# Altium PCB BLCD-M8.PCBDOC
Units mil, origin at the board's own origin, x right, y up, seen from the top; angles counter-clockwise.
Board outline 1968.5 x 1153.54 mil, 2 copper layers (Top Layer, Bottom Layer); 134 components, 42 nets, 378 pads, 136 vias.
Unrouted connection lines stored in the file: 1.
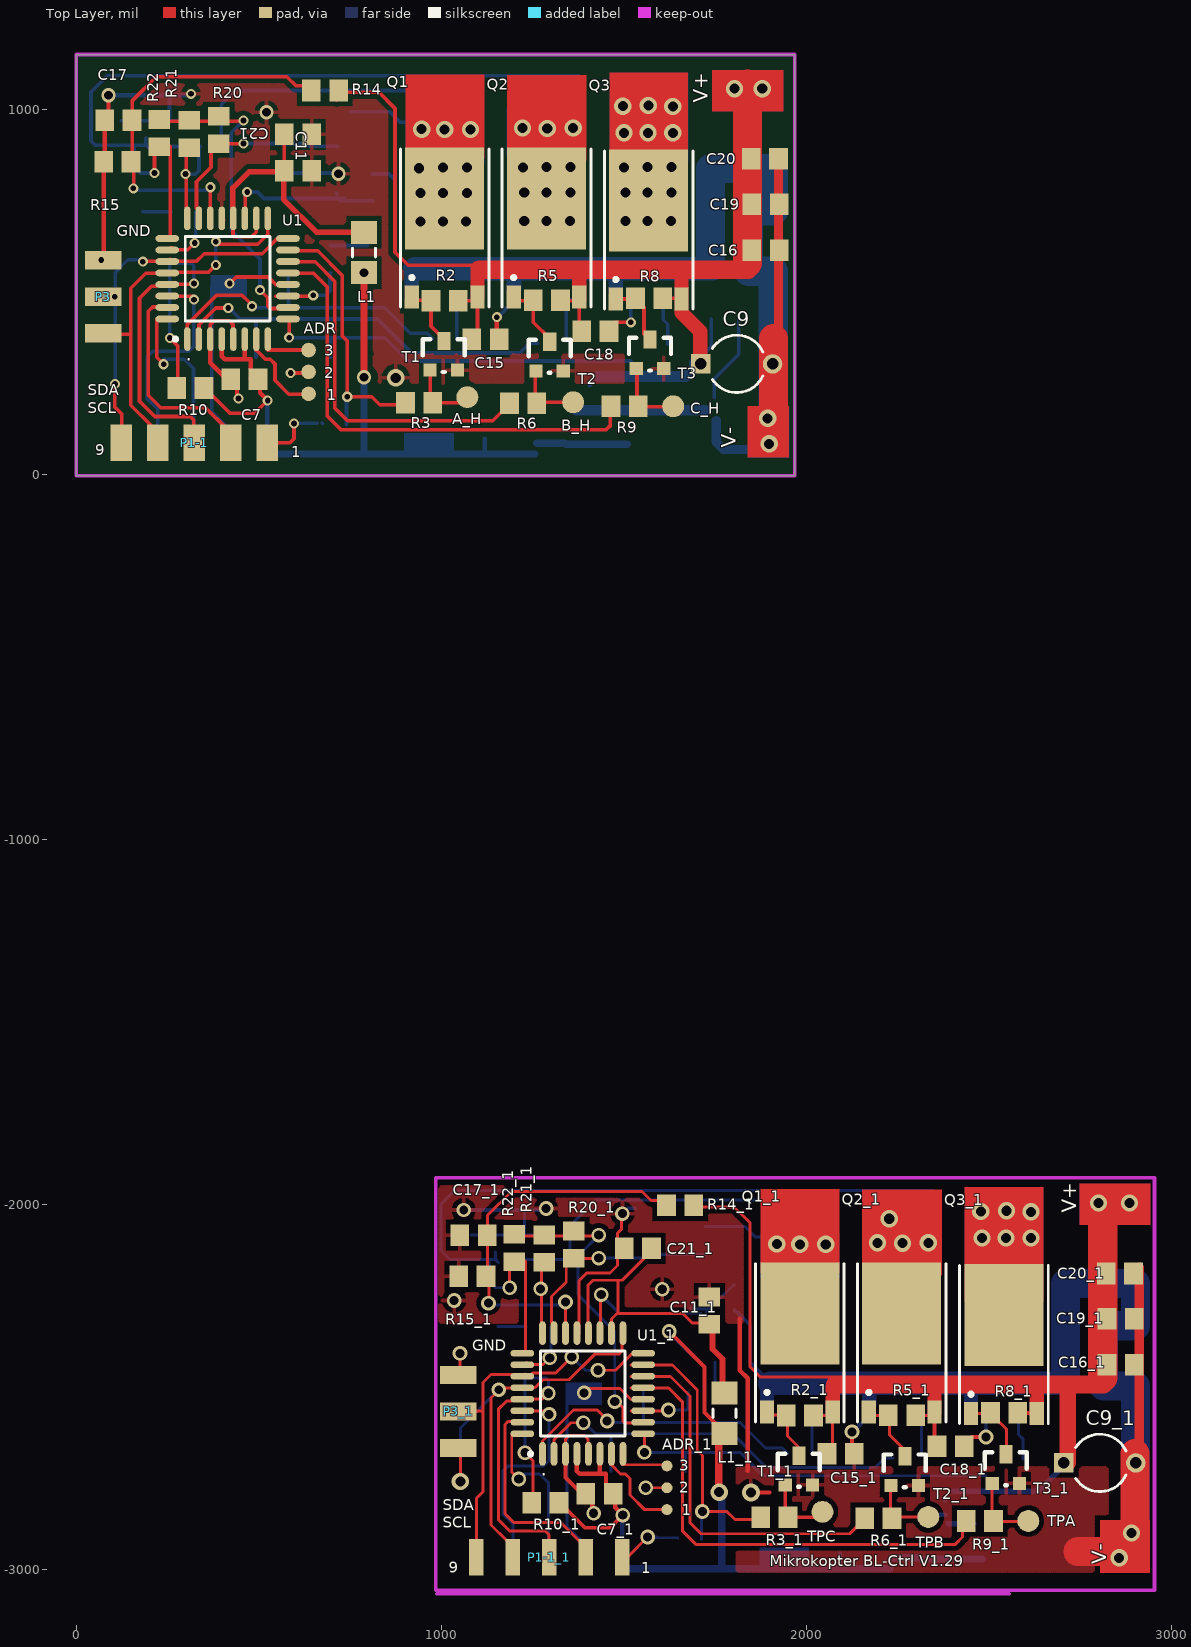
[diagram p0: Top Layer view]
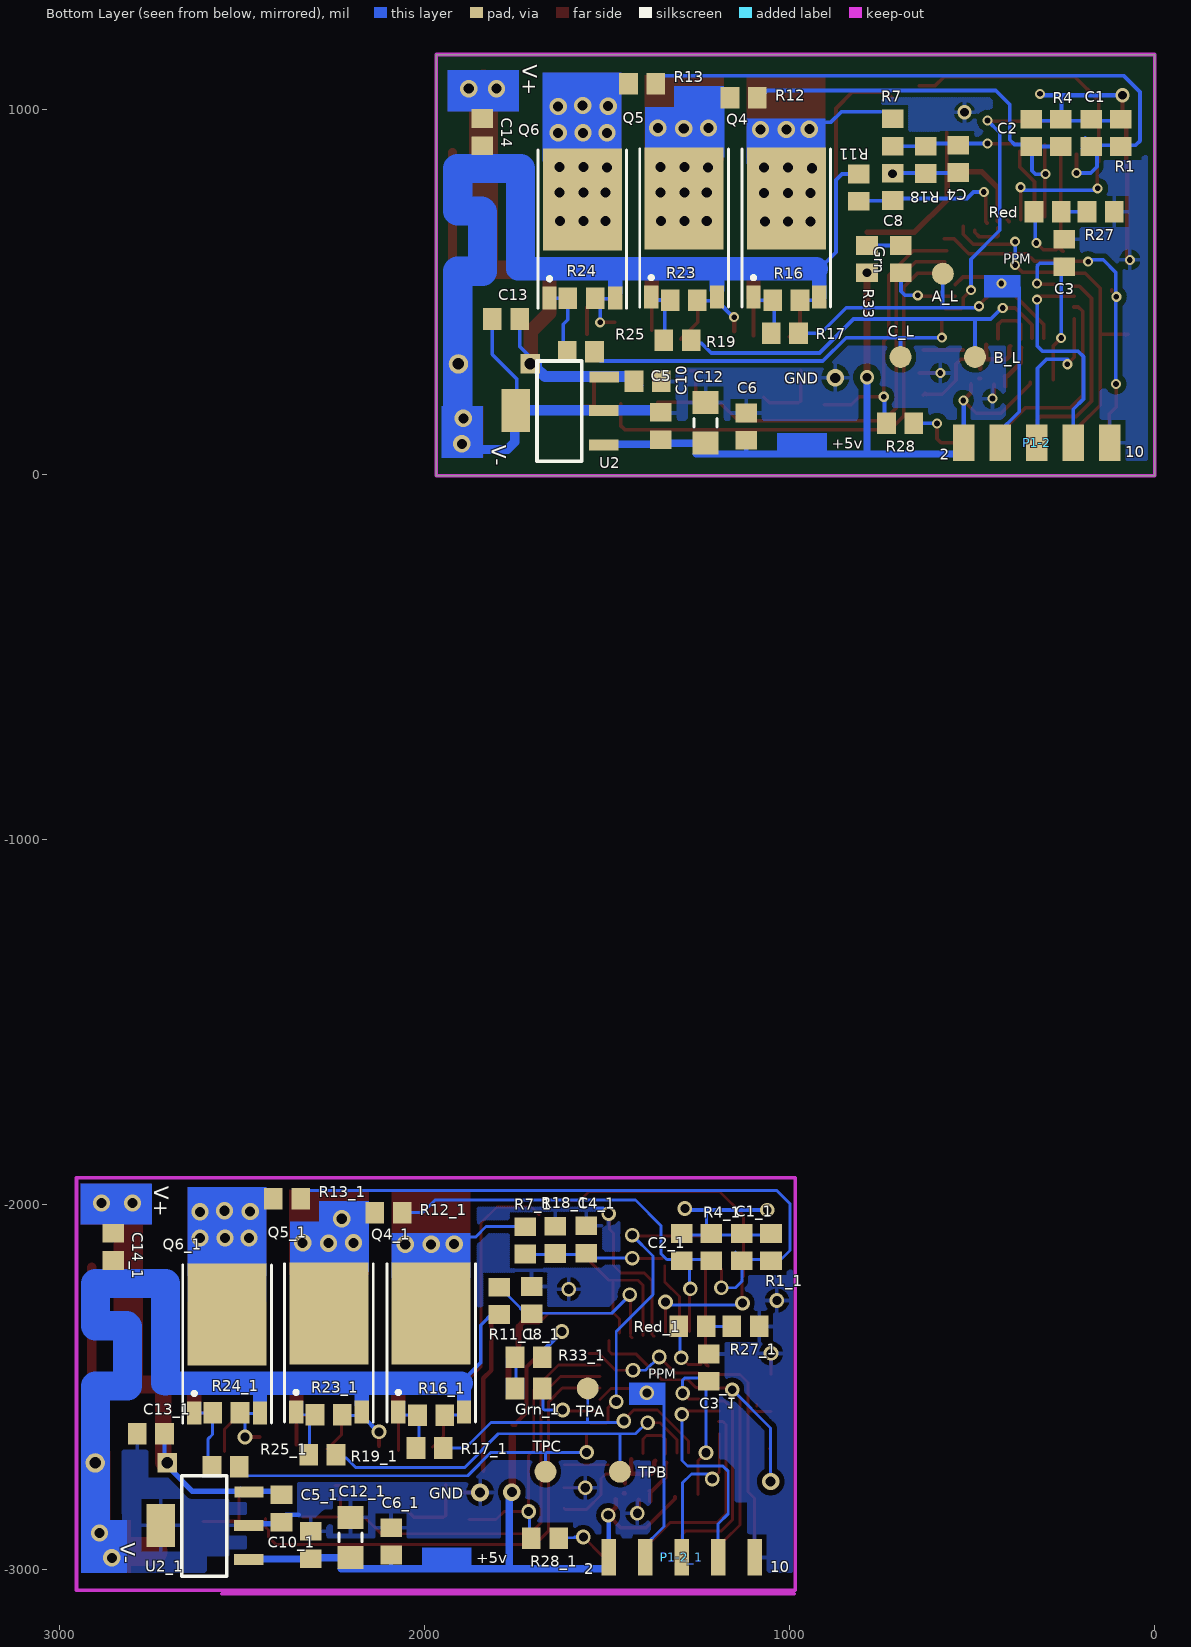
[diagram p1: Bottom Layer view, seen from below]

## Layer stack, top to bottom
Top Layer: signal copper 1.4
Dielectric: dielectric 12.6, FR-4, Dk 4.8
Bottom Layer: signal copper 1.4

## Board outline
0,-2 0,1151.54 1968.5,1151.54 1968.5,-2

## Design rules (kind name [scope] priority, off if disabled: settings)
Clearance Polygon [(InPolygon)] p1: gap=13
Clearance [All] p2: gap=10
ComponentClearance [All] p1: gap=10 collisioncheckmode=3 verticalgap=10
PolygonConnect [All] p1: connectstyle=Relief reliefconductorwidth=10 reliefentries=4 polygonreliefangle="90 Angle"
RoutingVias [All] p1: holewidth=25 width=40 viastyle="Through Hole" minholewidth=28 minwidth=50 maxholewidth=28 maxwidth=50
SolderMaskExpansion [All] p1: expansion=4
TestPointUsage [All] p1: valid=0 allowmultiple=FALSE
Testpoint [All] p1: side=15 testpointundercomponent=TRUE minsize=40 maxsize=100 preferedsize=60 minholesize=0 maxholesize=40 preferedholesize=32 testpointgrid=1 style=1023 order=0123456789
Width [All] p1: maxlimit=100 minlimit=10 preferedwidth=10
18 further rules are at their usual default settings.

## Classes and differential pairs
component class BLDC-M8_V1.24: ADR C1 C2 C3 C4 C5 C6 C7 C8 C9 C10 C11 C12 C13 C14 C15 C16 C17 C18 C19 C20 C21 Grn L1 P1-1 P1-2 P3 Q1 Q2 Q3 Q4 Q5 Q6 R1 R2 R3 R4 R5 R6 R7 R8 R9 R10 R11 R12 R13 R14 R15 R16 R17 R18 R19 R20 R21 R22 R23 R24 R25 R27 R28 R33 Red T1 T2 T3 U1 U2

## Components (designator, comment, footprint, x,y, rotation, side; value= is the part's Value field where it differs from the comment)
ADR "Address" "PCBComponent_1 - duplicate1"#1 636,282 r90 top (schematic designator P2)
ADR_1 "Address" "PCBComponent_1 - duplicate1"#2 1618,-2775 r90 top locked (schematic designator P2)
C1 "Cap" 6-0805 173,937 r270 bottom
C1_1 "Cap" 6-0805 1131,-2116 r270 bottom (schematic designator C1)
C2 "Cap" 6-0805 338,937 r270 bottom
C2_1 "Cap" 6-0805 1296,-2116 r270 bottom (schematic designator C2)
C3 "Cap" 6-0805 248,608 r90 bottom
C3_1 "Cap" 6-0805 1221,-2446 r90 bottom (schematic designator C3)
C4 "Cap" 6-0805 538,866 r90 bottom
C4_1 "Cap" 6-0805 1557,-2095 r270 bottom (schematic designator C4)
C5 "Cap" 6-0805 1353,134 r90 bottom
C5_1 "Cap" 6-0805 2311.98,-2931.98 r90 bottom (schematic designator C5)
C6 "Cap" 6-0805 1118.98,132.02 r90 bottom
C6_1 "Cap" 6-0805 2091.98,-2921.98 r90 bottom (schematic designator C6)
C7 "Cap" 6-0805 460,262 r180 top
C7_1 "Cap" 6-0805 1433,-2792 r180 top (schematic designator C7)
C8 "Cap" 6-0805 718,789 r90 bottom
C8_1 "Cap" 6-0805 1707,-2261 r90 bottom (schematic designator C8)
C9 "Comment" CAPR5-4X5 1809,304 r0 top
C9_1 "Comment" CAPR5-4X5 2804,-2707 r0 top
C10 "Cap" 6-0805 1389,256 r180 bottom
C10_1 "Cap" 6-0805 2391.98,-2831.98 r270 bottom (schematic designator C10)
C11 "Cap" 6-0805 607,833 r0 top
C11_1 "Cap" 6-0805 1733.99,-2290.02 r90 top (schematic designator C11)
C12 "Cap Pol1" 3216[1206] 1230,143 r90 bottom
C12_1 "Cap Pol1" 3216[1206] 2203,-2911 r90 bottom (schematic designator C12)
C13 "Cap" 6-0805 1777,427 r180 bottom
C13_1 "Cap" 6-0805 2750,-2627 r180 bottom (schematic designator C13)
C14 "Cap" 6-0805 1842,939 r90 bottom
C14_1 "Cap" 6-0805 2853,-2115 r90 bottom (schematic designator C14)
C15 "Cap" 6-0805 1121,372 r180 top
C15_1 "Cap" 6-0805 2094,-2682 r180 top (schematic designator C15)
C16 "Cap" 6-0805 1888,616 r0 top
C16_1 "Cap" 6-0805 2861,-2438 r0 top (schematic designator C16)
C17 "Cap" 6-0805 115,971 r180 top
C17_1 "Cap" 6-0805 1088,-2083 r180 top (schematic designator C17)
C18 "Cap" 6-0805 1422,393 r180 top
C18_1 "Cap" 6-0805 2395,-2661 r180 top (schematic designator C18)
C19 "Cap" 6-0805 1888,742 r0 top
C19_1 "Cap" 6-0805 2861,-2312 r0 top (schematic designator C19)
C20 "Cap" 6-0805 1886,866 r0 top
C20_1 "Cap" 6-0805 2859,-2188 r0 top (schematic designator C20)
C21 "Cap" 6-0805 607,933 r0 top
C21_1 "Cap" 6-0805 1538,-2119 r180 top (schematic designator C21)
Grn "LED0" 6-0805 696,591 r90 bottom
Grn_1 "LED0" 6-0805 1715,-2503 r0 bottom (schematic designator Grn)
L1 "Inductor" 3216[1206] 788,609 r90 top
L1_1 "Inductor" 3216[1206] 1776,-2571 r90 top (schematic designator L1)
P1-1 "MHDR1X5" "5 PIN"#1 323,88 r180 top
P1-1_1 "MHDR1X5" "5 PIN"#2 1296,-2966 r180 top (schematic designator P1-1)
P1-2 "MHDR1X5" "5 PIN"#1 323,88 r180 bottom
P1-2_1 "MHDR1X5" "5 PIN"#2 1296,-2966 r180 bottom (schematic designator P1-2)
P3 "TWI" "3 PIN" 73,488 r90 top
P3_1 "TWI" "3 PIN" 1046,-2566 r90 top (schematic designator P3)
Q1 "IRFR5305" TO-252AA 1009,622 r0 top
Q1_1 "IRFR5305" TO-252AA 1982,-2432 r0 top (schematic designator Q1)
Q2 "IRFR5305" TO-252AA 1288,622 r0 top
Q2_1 "IRFR5305" TO-252AA 2261,-2432 r0 top (schematic designator Q2)
Q3 "IRFR5305" TO-252AA 1568,617 r0 top
Q3_1 "IRFR5305" TO-252AA 2541,-2437 r0 top (schematic designator Q3)
Q4 "IRFR1205" TO-252AA 1009,622 r180 bottom
Q4_1 "IRFR1205" TO-252AA 1982,-2432 r180 bottom (schematic designator Q4)
Q5 "IRFR1205" TO-252AA 1289,622 r180 bottom
Q5_1 "IRFR1205" TO-252AA 2262,-2432 r180 bottom (schematic designator Q5)
Q6 "IRFR1205" TO-252AA 1568,619 r180 bottom
Q6_1 "IRFR1205" TO-252AA 2541,-2435 r180 bottom (schematic designator Q6)
R1 "Res2" 6-0805 93,937 r270 bottom
R1_1 "Res2" 6-0805 1051,-2116 r270 bottom (schematic designator R1)
R2 "Res2" 6-0805 1008.98,477.02 r0 top
R2_1 "Res2" 6-0805 1981.98,-2576.98 r0 top (schematic designator R2)
R3 "Res2" 6-0805 939,198 r0 top
R3_1 "Res2" 6-0805 1912,-2856 r0 top (schematic designator R3)
R4 "Res2" 6-0805 257,937 r270 bottom
R4_1 "Res2" 6-0805 1215,-2116 r270 bottom (schematic designator R4)
R5 "Res2" 6-0805 1289,478 r0 top
R5_1 "Res2" 6-0805 2262,-2576 r0 top (schematic designator R5)
R6 "Res2" 6-0805 1223.98,195.99 r0 top
R6_1 "Res2" 6-0805 2196.98,-2858.01 r0 top (schematic designator R6)
R7 "Res2" 6-0805 718,938 r270 bottom
R7_1 "Res2" 6-0805 1724,-2097 r270 bottom (schematic designator R7)
R8 "Res2" 6-0805 1569,484 r0 top
R8_1 "Res2" 6-0805 2542,-2570 r0 top (schematic designator R8)
R9 "Res2" 6-0805 1502.02,188 r0 top
R9_1 "Res2" 6-0805 2475.02,-2866 r0 top (schematic designator R9)
R10 "Res2" 6-0805 312,238 r0 top
R10_1 "Res2" 6-0805 1285,-2816 r0 top (schematic designator R10)
R11 "Res2" 6-0805 811,787 r90 bottom
R11_1 "Res2" 6-0805 1796,-2263 r270 bottom (schematic designator R11)
R12 "Res2" 6-0805 1126,1033 r180 bottom
R12_1 "Res2" 6-0805 2099,-2021 r180 bottom (schematic designator R12)
R13 "Res2" 6-0805 1404,1071 r180 bottom
R13_1 "Res2" 6-0805 2377,-1983 r180 bottom (schematic designator R13)
R14 "Res2" 6-0805 681,1053 r0 top
R14_1 "Res2" 6-0805 1654,-2001 r0 top (schematic designator R14)
R15 "Res2" 6-0805 112,858 r0 top
R15_1 "Res2" 6-0805 1085,-2196 r0 top (schematic designator R15)
R16 "Res2" 6-0805 1008.98,478 r180 bottom
R16_1 "Res2" 6-0805 1981.98,-2576 r180 bottom (schematic designator R16)
R17 "Res2" 6-0805 1013,388 r0 bottom
R17_1 "Res2" 6-0805 1986,-2666 r0 bottom (schematic designator R17)
R18 "Res2" 6-0805 627,863 r90 bottom
R18_1 "Res2" 6-0805 1642,-2096 r270 bottom (schematic designator R18)
R19 "Res2" 6-0805 1307.02,368.98 r0 bottom
R19_1 "Res2" 6-0805 2280.02,-2685.02 r0 bottom (schematic designator R19)
R20 "Res2" 6-0805 390,945 r90 top
R20_1 "Res2" 6-0805 1363,-2109 r90 top (schematic designator R20)
R21 "Res2" 6-0805 309,934 r90 top
R21_1 "Res2" 6-0805 1282,-2120 r90 top (schematic designator R21)
R22 "Res2" 6-0805 227,936 r90 top
R22_1 "Res2" 6-0805 1200,-2118 r90 top (schematic designator R22)
R23 "Res2" 6-0805 1290,479 r180 bottom
R23_1 "Res2" 6-0805 2263,-2575 r180 bottom (schematic designator R23)
R24 "Res2" 6-0805 1570,484 r180 bottom
R24_1 "Res2" 6-0805 2543,-2570 r180 bottom (schematic designator R24)
R25 "Res2" 6-0805 1572,337 r0 bottom
R25_1 "Res2" 6-0805 2545,-2717 r0 bottom (schematic designator R25)
R27 "Res2" 6-0805 148,720.99 r0 bottom
R27_1 "Res2" 6-0805 1121,-2333.01 r0 bottom (schematic designator R27)
R28 "Res2" 6-0805 697,141 r180 bottom
R28_1 "Res2" 6-0805 1670,-2913 r180 bottom (schematic designator R28)
R33 "Res2" 6-0805 788,591 r90 bottom
R33_1 "Res2" 6-0805 1715,-2417 r0 bottom (schematic designator R33)
Red "LED0" 6-0805 293,720.99 r180 bottom
Red_1 "LED0" 6-0805 1266,-2333.01 r180 bottom (schematic designator Red)
T1 "1P" SOT-23 969,287 r0 top
T1_1 "1P" SOT-23 1942,-2767 r0 top (schematic designator T1)
T2 "1P" SOT-23 1259,285 r0 top
T2_1 "1P" SOT-23 2232,-2769 r0 top (schematic designator T2)
T3 "1p" SOT-23 1534,291 r0 top
T3_1 "1p" SOT-23 2509,-2763 r0 top (schematic designator T3)
U1 "ATMEGA8_TQFP32" MEGA8 304,372 r90 top
U1_1 "ATMEGA8_TQFP32" MEGA8 1277,-2682 r90 top (schematic designator U1)
U2 "78L05" AMS1117 1509,82 r90 bottom
U2_1 "78L05" AMS1117 2482,-2972 r90 bottom (schematic designator U2)

## Footprints (in the part's own frame and the unit in brackets; to place one, negate y for a bottom-side part, rotate by r counter-clockwise, add the part's x,y. Pads: shape width x height; smd on the part's side, far side on the other; paste and mask are expansions set on the pad)
"3 PIN" [mil]
  rect 50x100 smd: 1(-100,0) 2(0,0) 3(100,0)
"5 PIN"#1 [mil]
  rect 60x100 smd: 1(-200,0) 2(-100,0) 3(0,0) 4(100,0) 5(200,0)
"5 PIN"#2 [mil]
  rect 40x100 smd: 1(-200,0) 2(-100,0) 3(0,0) 4(100,0) 5(200,0)
6-0805 [mm] "Chip Resistor; Body 2.0 x 1.3 mm (LxW typ)"
  rect 1.3x1.5 smd: 1(-0.95,0) 2(0.95,0)
3216[1206] [mm] "Chip Resistor; Body 3.2 x 1.6 mm (LxW typ)"
  rect 1.6x1.8 smd: 1(-1.4,0) 2(1.4,0)
  silkscreen extent -0.3,-0.8 0.3,0.8
AMS1117 [mil]
  rect 118.11x78.74 smd: 0(94,241)
  rect 30x80 smd: 1(0,0) 2(94,0) 3(186,-1)
  silkscreen extent -45,60 230,183
CAPR5-4X5 [mm] "Capacitor; 2 Leads"
  rect 1.35x1.35 hole 0.8: 1(-2.5,0)
  round 1.35 hole 0.8: 2(2.5,0)
  silkscreen extent -1.69,-2 1.82,2
MEGA8 [mm]
  oval 1.65x0.457 smd: 1(0,0) 2(0,-0.8) 3(0,-1.6) 4(0,-2.4) 5(0,-3.2) 6(0,-4) 7(0,-4.8) 8(0,-5.6) 17(8.4,-5.6) 18(8.4,-4.8) 19(8.4,-4) 20(8.4,-3.2) 21(8.4,-2.4) 22(8.4,-1.6) 23(8.4,-0.8) 24(8.4,0)
  oval 0.457x1.65 smd: 9(1.4,-7) 10(2.2,-7) 11(3,-7) 12(3.8,-7) 13(4.6,-7) 14(5.4,-7) 15(6.2,-7) 16(7,-7) 25(7,1.4) 26(6.2,1.4) 27(5.4,1.4) 28(4.6,1.4) 29(3.8,1.4) 30(3,1.4) 31(2.2,1.4) 32(1.4,1.4)
  silkscreen extent -0.12,-5.75 7.15,0.95
"PCBComponent_1 - duplicate1"#1 [mil]
  round 40 smd: 1(-60,0) 2(0,0) 3(60,0)
"PCBComponent_1 - duplicate1"#2 [mil]
  round 30 smd: 1(-60,0) 2(0,0) 3(60,0)
SOT-23 [mil]
  rect 36x36 smd: 1(75,0) 2(0,0)
  rect 36x50 smd: 3(38,80)
  silkscreen extent -20,-5 95,85
TO-252AA [mm] "D-PAK/TO-252-AA; 3 Leads (1 Cropped); Body 10.4 (inc. leads) x 6.7 mm (LxW max)"
  rect 1x1.6 smd: 1(-2.285,-3.425) 3(2.285,-3.425)
  rect 5.5x7.1 smd: 4(0,3.425)
  silkscreen extent -3.09,-4.13 3.09,6.88

## Part data
ADR ADR_1 P3 P3_1: library part "Header 3", "Header, 3-Pin"
C1 C1_1 C2 C2_1 C3 C3_1 C4 C4_1 C5 C5_1 C6 C6_1 C7 C7_1 C8 C8_1 C10 C10_1 C11 C11_1 C13 C13_1 C14 C14_1 C15 C15_1 C16 C16_1 C17 C17_1 C18 C18_1 C19 C19_1 C20 C20_1 C21 C21_1: "Capacitor"
C12 C12_1: "Polarized Capacitor (Radial)"
Grn Grn_1 Red Red_1: "Typical INFRARED GaAs LED"
P1-1 P1-1_1 P1-2 P1-2_1: "Header, 5-Pin"
Q1 Q1_1 Q2 Q2_1 Q3 Q3_1 Q4 Q4_1 Q5 Q5_1 Q6 Q6_1: "HEXFET Power MOSFET"
R1 R1_1 R2 R2_1 R3 R3_1 R4 R4_1 R5 R5_1 R6 R6_1 R7 R7_1 R8 R8_1 R9 R9_1 R10 R10_1 R11 R11_1 R12 R12_1 R13 R13_1 R14 R14_1 R15 R15_1 R16 R16_1 R17 R17_1 R18 R18_1 R19 R19_1 R20 R20_1 R21 R21_1 R22 R22_1 R23 R23_1 R24 R24_1 R25 R25_1 R27 R27_1 R28 R28_1 R33 R33_1: "Resistor"
T1 T1_1: library part 2N3904, "NPN General Purpose Amplifier"
T2 T2_1 T3 T3_1: library part QNPN, "NPN Bipolar Transistor"
U1 U1_1: "Atmel Microcontroller - Library created by carel..  <www.mpfreezone.com>"
U2 U2_1: "3-Terminal Positive Voltage Regulator"

## Free pads (board coordinates)
  round 60 smd: 0(1635,188) 0(2608,-2866) 1(1361,199) 1(2334,-2855) 2(1071,213) 2(2044,-2841)
  round 60 smd far side: 3(580.08,551.21) 3(1553.08,-2502.79) 4(492,323) 4(1465,-2731) 5(696,323) 5(1669,-2731)

## Via types
v1: diameter 47.24, hole 27.56, Top Layer to Bottom Layer, tented both sides, 63 vias
v2: diameter 40, hole 25, Top Layer to Bottom Layer, tented both sides, 31 vias
v3: diameter 27.56, hole 15.75, Top Layer to Bottom Layer, tented both sides, 31 vias
v4: diameter 39.37, hole 23.62, Top Layer to Bottom Layer, tented both sides, 7 vias
v5: diameter 40, hole 25, Top Layer to Bottom Layer, 2 vias
v6: diameter 50, hole 28, Top Layer to Bottom Layer, 1 vias
v7: diameter 27.56, hole 15.75, Top Layer to Bottom Layer, 1 vias

## Nets (pads, with @x,y where several pads share a name; then routed paths per layer and width w, separated by ;. In a path a pad name is that pad's centre, name@x,y a point inside that pad or via, vN(x,y) a via of type N, cw(c..) or ccw(c..) an arc to the next point about the centre after c; other vN are vias at no path point)
+5V: C5.1 C6.1 C7.1 C12.1 L1.1 P1-2.1 R10.2 R33.1 U1.4 U1.6 U2.1 | length 2072.6
  Top Layer w10: R10.2@341,254 341,249 421,169 489,169 v3@520,200
  Top Layer w12: U1.4@395,353 398,350 398,325 405,318 ; 406,317 478,317 C7.1@478,291 ; 461,322 U1.6@461,357 ; C7.1@478,264 C7.1@481,264 ; C7.1@503,248.28 503,225 v3(524,204)
  Top Layer w20: v4(788,267) v4(788,553.6)
  Bottom Layer w10: P1-2.1 P1-2.1@523,100 ; 1323.32,88.54 C5.1@1339,88.54
  Bottom Layer w12: P1-2.1@514,107 523,116 v3@523,196 ; 1119,56 C6.1@1119,98.54
  Bottom Layer w20: P1-2.1@541,57 C12.1@1256,57 ; 788,63 v4(788,267) ; C12.1@1261,87 C5.1@1338,87 ; C5.1@1340,84 U2.1@1509,84
A1: ADR.1 U1.7 | length 229.6
  Top Layer w10: U1.7@491,342 U1.7@491,349 ; U1.7@494,341 518,317 531,317 544,304 544,259 582,221 632,221 ADR.1@634,219 ; ADR.1@625,220 ADR.1@629,224
A3: ADR.3 U1.8 | length 109
  Top Layer w10: U1.8@524,342 ADR.3@633,342
A_H: R3.1 R28.1 U1.15 | length 785.2
  Top Layer w10: U1.15@570,614 661,614 728,547 728,381 742,367 v3(742,214) 809,214 831,192 R3.1@905.54,192
  Bottom Layer w10: v3@739,224 740,224 R28.1@740,137
A_L: pad.3@580.08,551.21 R17.1 U1.1 | length 870.3
  Top Layer w10: U1.1@304,375 304,412 384,492 454,492 472,474
  Bottom Layer w10: v3@479,461 482,458 845,458 915,388 961,388 R17.1@976,373 ; pad.3@580.08,551.21 581,460
  other v3: 481,462
AVERAGE: R20.2 R21.2 R22.2 U1.10 | length 831
  Top Layer w10: R22.2@234,968.46 442,968.46 ; v3@502,514 v3@509,514 ; v3(503,506) 524,485 524,462 530,456 U1.10@573,456
  Bottom Layer w10: v3(458,971) 424,937 424,670 503,591 v3(503,506)
B_H: R6.1 U1.14 | length 1016.2
  Top Layer w10: U1.14@575,583.63 654.37,583.63 708,530 708,183 743,148 1141,148 R6.1@1188,195
B_L: pad.4@492,323 R19.1 U1.2 | length 1146.6
  Top Layer w10: U1.2@336,374 336,411 382,457 v3(416,457)
  Bottom Layer w10: v3@418,458 449,427 825,427 918,334 1215,334 1242,361 R19.1@1264,361 ; pad.4@492,323 492,425
C_H: R9.1 U1.13 | length 1338.1
  Top Layer w10: U1.13@574,552.13 649.63,552.13 687,514.76 687,161 724,124 1452,124 1463,135 R9.1@1463,195
C_L: pad.5@696,323 R25.1 U1.9 | length 1061.5
  Top Layer w10: v3(583,376) U1.9@583,425
  Bottom Layer w10: v3(583,376) 845,376 909,312 R25.1@1518,312 ; pad.5@696,323 696,374
CURRENT: C8.1 R11.1 U1.19 | length 454.4
  Top Layer w10: U1.19@459,690 U1.19@463,694 ; U1.19@463,699.77 463,769 v3@469,775
  Bottom Layer w10: v3(468,775) 496,775 514,757 C8.1@737,757 ; C8.1@711,772 C8.1@714,769 ; C8.1@723,751 R11.1@813.3,751
GND: ADR.2 C1.1 C2.1 C3.2 C4.1 C5.2 C6.2 C7.2 C8.2 C9.2 C10.2 C11.2 C12.2 C13.1 C14.1 C15.1 C16.2 C17.2 C18.1 C19.2 C20.2 C21.2 P1-2.5 P3.3 Q4.3 Q5.3 Q6.3 R1.1 R4.1 R11.2 R15.1 R16.2 R18.1 R23.2 R24.2 R27.1 T1.1 T2.1 T3.1 U1.3 U1.5 U1.21 U2.0 U2.2 | length 7149.3
  Top Layer w10: U1.3 367,412 377,422 419,422 428.98,412.02 U1.5@428.98,373 ; U1.21@399,694 U1.21@404,699 ; v3(587,279) v3@587.96,279.19 ; v3@588,279 ADR.2@645,279 ; C18.1@1479,418 v3(1519,418)
  Top Layer w12: P3.3@74.6,582.6 R15.1 ; R15.1@77.6,861 C17.2 ; C17.2@88,969 v4(88,1040) ; U1.3@365,348 367,346 367,307 404,270 C7.2@411,270 ; C7.2@409,242 C7.2@409,263 ; v3@440,207 C7.2@440,247 ; C15.1@1152,394 v3(1152,432)
  Top Layer w25: 1924,395 C20.2@1924,883
  Top Layer w80: 1909.46,191 1909.46,374
  Bottom Layer w10: 123,970.46 C2.1@323,970.46 ; R4.1@255,975 255,1040 ; R11.2 856.6,824.4 873,808 873,610 906,577 918,577 918,576 ; Q4.3@929,478 R16.2@975.54,478 ; 932,547 932,556 ; 998.5,564.96 1769,564.96 ; 1199,534.92 1236.08,572 1737,572 ; Q5.3@1211,477 R23.2@1252,477 ; Q6.3@1480,483 R24.2@1526.54,483 ; v3@1519,423 R24.2@1519,467 ; U2.0@1748,211 1748,263 1815,330 C13.1@1815,430
  Bottom Layer w12: v4(88,1040) v3@312,1040 ; C4.1@541,827 C8.2@721,827 ; v3@1152,430 Q5.3@1196,474
  Bottom Layer w25: U2.0@1753,149 1753,90 1773,70 1859,70
  Bottom Layer w30: C5.2@1369,177 U2.0@1723,177
  Bottom Layer w39: Q4.3@919,486 919,573 ; Q6.3@1478,498.72 1478,555.99
  Bottom Layer w40: Q5.3@1199,508 1199,534.92
  Bottom Layer w65: 927,564.96 1744,564.96
  Bottom Layer w80: 1737,572 1737,839 1909.45,839 1909.45,723 1844,723 1841,720 1841,558 1909.45,558 1909.45,177
  other v1: 1898,85 1894,155 875,266
  other v3: 444,209 68,589 314,1044
  other v4: 718,825 521,993
GREEN: Grn.1 U1.11 | length 199.9
  Top Layer w10: 546.62,489.14 U1.11@597,489.14 ; U1.11@599,489 v3@647,489
  Bottom Layer w10: v3(649,492) 684,492 695,503 695,552.6 Grn.1
INT0: P1-2.3 U1.32 | length 430.3
  Top Layer w10: U1.32@219.85,427 219.85,322.15 v3(239,303)
  Bottom Layer w10: 238,317 296,317 321,292 P1-2.3@321,87
NetC11_1: C11.1 C21.1 L1.2 U1.18 U1.20 | length 779.3
  Top Layer w10: U1.20@429,677 429,656 433,652 480,652 493,665 493,670 ; C11.1@569,837 C21.1@569,938
  Top Layer w15: U1.20@429,696 429,786 474,831 568,831 568,755 658.88,664.12 L1.2
NetD1_2: Grn.2 R33.2 | length 102
  Bottom Layer w10: Grn.2 R33.2@798,628.4
NetD2_2: R27.2 Red.2 | length 78.1
  Bottom Layer w10: R27.2@181.46,721 Red.2@259.54,721
NetP1-1_1: P1-1.1 R28.2 | length 199
  Top Layer w10: P1-1.1 585,88 596,99 v3(596,141) ; P1-1.1@524,91 P1-1.1@539,91
  Bottom Layer w10: v3(596,141) R28.2@659,141 ; R28.2@673.54,142 R28.2@674.54,141
NetQ1_1: Q1.1 R2.1 T1.3 | length 162.7
  Top Layer w10: Q1.1@924,478 R2.1@975.54,478 ; R2.1 971.58,407.42 T1.3@1001,378
NetQ2_1: Q2.1 R5.1 T2.3 | length 173.2
  Top Layer w10: Q2.1@1200,477 R5.1@1248,477 ; R5.1 1251.6,418.4 T2.3@1298,372
NetQ3_1: Q3.1 R8.1 T3.3 | length 116
  Top Layer w10: Q3.1@1480,482 R8.1@1522,482 ; T3.3@1555,385 R8.1@1555,459
NetQ4_1: Q4.1 R16.1 R17.2 | length 179.2
  Bottom Layer w10: R17.2@1042.46,370 1042.46,478 Q4.1@1098.96,478 ; Q4.1@1098.96,472.5 Q4.1
NetQ5_1: Q5.1 R19.2 R23.1 | length 159.6
  Bottom Layer w10: R23.1 Q5.1@1377,479 ; R19.2@1342.46,367 R23.1@1342.46,477
NetQ6_1: Q6.1 R24.1 R25.2 | length 176.4
  Bottom Layer w10: R24.1 Q6.1@1657.8,484 ; R24.1@1608,479 1608,425 1620,413 R25.2@1620,358
NetR3_2: pad.2@1071,213 R3.2 T1.2 | length 185.8
  Top Layer w10: R3.2@969,202 T1.2 ; R3.2 1056,198 pad.2@1071,213
NetR6_2: pad.1@1361,199 R6.2 T2.2 | length 202.5
  Top Layer w10: R6.2@1257.46,196 T2.2@1257.46,285.46 ; T2.2 T2.2@1272,285 ; R6.2@1261,199 pad.1@1361,199
NetR9_2: pad.0@1635,188 R9.2 T3.2 | length 218
  Top Layer w10: R9.2@1536,180 T3.2@1536,275 ; R9.2@1536,187 pad.0@1634,187 ; R9.2@1536,188 R9.2@1561.01,188
NULL_A: C4.2 R7.2 R18.2 R20.1 U1.23 | length 507
  Top Layer w10: U1.23@329,731 329,803 369,843 R20.1@369,887 ; R20.1@376,907 v3@459,907
  Bottom Layer w10: v3(458,908) R18.2@621,908 ; R18.2 R7.2@715.4,900.4
NULL_B: C2.2 R4.2 R12.2 R21.1 U1.24 | length 1237.8
  Top Layer w10: U1.24@301,707 R21.1@301,904
  Bottom Layer w10: R4.2 C2.2@338.6,899.6 ; v3(299,824) 327,824 336,833 C2.2@336,899.6 ; C2.2@364,905 384,905 397,918 397,1015 435,1053 1061,1053 R12.2@1087,1027
NULL_C: C1.2 R1.2 R13.2 R22.1 U1.25 | length 2104.7
  Top Layer w10: v3(214,827) R22.1@214,878 ; U1.25@257,644 257,900
  Bottom Layer w10: C1.2@158,900.6 158,844 175,827 v3(214,827) ; C1.2@190,903.54 C1.2@190,924 ; C1.2@198,895 193,900 193,903.54 51.46,903.54 40,915 40,1049 84,1093 R13.2@1377,1093
PHASE_A: Q1.4 Q4.4 R7.1 | length 426.7
  Top Layer w10: Q1.4 Q1.4@1009,773
  Bottom Layer w10: 751,994.4 858.6,994.4 886.54,966.46 915,966.46 ; v1@936,937 999,937 v1@1009,927 ; v1@936,950.46 1070.54,950.46 v1@1084,937 ; v1@1006,937 v1@1009,934
  other v1: 943,694 1004,694 1068,694 943,772 1004,772 1070,772 939,840 1004,842 1070,842 1009,946 1080,946 946,947
PHASE_B: Q2.4 Q5.4 R12.1 | length 373
  Top Layer w10: Q2.4@1309,756.84 1309,887 1342,920
  Bottom Layer w10: Q5.4@1243,782.46 Q5.4@1309,782.46 ; Q5.4@1309,756.84 Q5.4@1309,782.46 ; Q5.4@1309,887 Q5.4@1309,782.46
  other v1: 1227,696 1288,696 1352,696 1227,774 1288,774 1354,774 1223,842 1288,844 1354,844 1290,949 1222,950 1361,950
PHASE_C: Q3.4 Q6.4 R13.1 | length 211.5
  Top Layer w10: Q3.4@1609,719 Q3.4@1609,756.84
  Bottom Layer w10: 1553,1072 1568,1087 ; Q6.4@1608,719 1608,756.84 Q6.4@1608,871.46
  other v1: 1504,696 1565,696 1629,696 1504,774 1565,774 1631,774 1500,842 1565,844 1631,844 1500,937 1566,937 1634,937 1634,1009 1497,1010 1567,1012
PPM: P1-2.2 U1.12 | length 599.3
  Top Layer w10: v3(420,524) 438,542 525.26,542 546.62,520.64
  Bottom Layer w10: 372,515 371,514 371,173 432,112 432,97 P1-2.2
RED: Red.1 U1.26 | length 165.6
  Top Layer w10: U1.26@250,613 U1.26@258.8,621.8 ; U1.26@254,614 U1.26@261.8,621.8 ; U1.26@270,617 305,617 v3(324,635)
  Bottom Layer w10: v3@327,638 Red.1@327,719
RESET: C3.1 P1-1.3 R10.1 U1.29 | length 1043.4
  Top Layer w10: U1.29@220,517 206,517 173,484 173,202 215,160 313,160 ; v3(256,375) 278,353 R10.1@278,261 ; U1.29@275,522 v3@322,522 ; 312,160 322,150 P1-1.3@322,112
  Bottom Layer w10: C3.1@248,579.54 314.46,579.54 322,572 v3@322,526 ; v3(256,375) C3.1@256,573
  other v3: 322,524
RXD: P1-2.4 U1.30 | length 615.3
  Top Layer w10: U1.30@219.85,489.14 v3@321.86,489.14
  Bottom Layer w10: 195,321.24 195,324 210,339 307,339 322,354 v3(322,480) ; 195.61,321.24 195,320.63 195,208 223,180 P1-2.4
SCL: P1-1.4 P3.1 U1.17 U1.28 | length 938.2
  Top Layer w10: P3.1@73,385 148,385 ; P3.1@78.98,382.98 P3.1@82,386 ; P1-1.4@205,135 149,191 149,511 190.13,552.13 U1.28@219.85,552.13 ; U1.28@249.85,552.13 U1.28@253.72,556 ; U1.28@266,555 362,555 v3(382,575) ; v3(382,639) 389,632 497,632 524,659 U1.17@524,681
  Bottom Layer w10: v3(382,575) v3(382,639)
SDA: P1-1.5 P3.2 U1.16 U1.27 | length 972.7
  Top Layer w10: v3@105,251 105,186 124,167 P1-1.5@124,109 ; P3.2@117,503 P3.2@117,507 ; v3@181,585 329,585 350,606 509,606 549.62,646.62 U1.16@576.62,646.62 ; U1.27@249.85,583.63 U1.27@256.36,590.14
  Bottom Layer w10: v3(106,249) 106,554 141,589 v3@175,589
  other v3: 105,488 182,584
TXD: P1-1.2 U1.31 | length 511.7
  Top Layer w10: U1.31@222,460 209,460 197,448 197,218 231,184 354,184 P1-1.2@411,127
U_BAT: C17.1 R14.1 R15.2 U1.22 | length 1061.5
  Top Layer w10: R15.2@153.46,858 153.46,1025.46 219,1091 576.54,1091 601.54,1066 R14.1@645,1066 ; v3@157,785 R15.2@157,851 ; U1.22@367,699 v7(367,788)
  Bottom Layer w10: v3@159,780 v7@369,780
  other v3: 156,785
VCC: C9.1 C10.1 C13.2 C14.2 C15.2 C16.1 C18.2 C19.1 C20.1 Q1.3 Q2.3 Q3.3 R2.2 R5.2 R8.2 R14.2 U2.3 | length 3202.7
  Top Layer w10: R14.2@713.46,1027 734.46,1048 829,1048 873,1004 873,610 909,574 1094,574 ; R2.2@1042.46,477 Q1.3@1090,477 ; C15.2@1098.96,381 Q1.3 ; R5.2@1342.46,477 Q2.3@1392,477 ; C18.2@1377.96,397.04 Q2.3@1377.96,490 ; R8.2@1610,484 Q3.3@1657,484
  Top Layer w39: Q1.3 1098.96,566 ; Q2.3@1377.96,484.16 1377.96,557 ; 1657.96,542.04 1657.96,444.04 1709,393 C9.1@1709,318.43
  Top Layer w50: 1105,562 1841,562
  Top Layer w80: 1839,581 1839,1070.46
  Bottom Layer w10: C9.1@1708,320 1739.6,351.6 C13.2
  Bottom Layer w12: C10.1@1406,245 C10.1@1406,245.46 ; U2.3@1531,277 U2.3@1539,269
  Bottom Layer w30: C10.1@1429.54,269 1670,269 1694,293 C9.1@1694,308
  other v1: 1803,1058 1879,1058
pads on no net: ADR_1.1 ADR_1.2 ADR_1.3 C1_1.1 C1_1.2 C2_1.1 C2_1.2 C3_1.1 C3_1.2 C4_1.1 C4_1.2 C5_1.1 C5_1.2 C6_1.1 C6_1.2 C7_1.1 C7_1.2 C8_1.1 C8_1.2 C9_1.1 C9_1.2 C10_1.1 C10_1.2 C11_1.1 C11_1.2 C12_1.1 C12_1.2 C13_1.1 C13_1.2 C14_1.1 C14_1.2 C15_1.1 C15_1.2 C16_1.1 C16_1.2 C17_1.1 C17_1.2 C18_1.1 C18_1.2 C19_1.1 C19_1.2 C20_1.1 C20_1.2 C21_1.1 C21_1.2 Grn_1.1 Grn_1.2 L1_1.1 L1_1.2 P1-1_1.1 P1-1_1.2 P1-1_1.3 P1-1_1.4 P1-1_1.5 P1-2_1.1 P1-2_1.2 P1-2_1.3 P1-2_1.4 P1-2_1.5 P3_1.1 P3_1.2 P3_1.3 Q1_1.1 Q1_1.3 Q1_1.4 Q2_1.1 Q2_1.3 Q2_1.4 Q3_1.1 Q3_1.3 Q3_1.4 Q4_1.1 Q4_1.3 Q4_1.4 Q5_1.1 Q5_1.3 Q5_1.4 Q6_1.1 Q6_1.3 Q6_1.4 R1_1.1 R1_1.2 R2_1.1 R2_1.2 R3_1.1 R3_1.2 R4_1.1 R4_1.2 R5_1.1 R5_1.2 R6_1.1 R6_1.2 R7_1.1 R7_1.2 R8_1.1 R8_1.2 R9_1.1 R9_1.2 R10_1.1 R10_1.2 R11_1.1 R11_1.2 R12_1.1 R12_1.2 R13_1.1 R13_1.2 R14_1.1 R14_1.2 R15_1.1 R15_1.2 R16_1.1 R16_1.2 R17_1.1 R17_1.2 R18_1.1 R18_1.2 R19_1.1 R19_1.2 R20_1.1 R20_1.2 R21_1.1 R21_1.2 R22_1.1 R22_1.2 R23_1.1 R23_1.2 R24_1.1 R24_1.2 R25_1.1 R25_1.2 R27_1.1 R27_1.2 R28_1.1 R28_1.2 R33_1.1 R33_1.2 Red_1.1 Red_1.2 T1_1.1 T1_1.2 T1_1.3 T2_1.1 T2_1.2 T2_1.3 T3_1.1 T3_1.2 T3_1.3 U1_1.1 U1_1.2 U1_1.3 U1_1.4 U1_1.5 U1_1.6 U1_1.7 U1_1.8 U1_1.9 U1_1.10 U1_1.11 U1_1.12 U1_1.13 U1_1.14 U1_1.15 U1_1.16 U1_1.17 U1_1.18 U1_1.19 U1_1.20 U1_1.21 U1_1.22 U1_1.23 U1_1.24 U1_1.25 U1_1.26 U1_1.27 U1_1.28 U1_1.29 U1_1.30 U1_1.31 U1_1.32 U2_1.0 U2_1.1 U2_1.2 U2_1.3
copper on no net: | length 35073
  Top Layer w8: 1051,-2566 1097,-2566 ; 1051,-2464 v2(1051,-2407) ; v1(1051.98,-2758.01) 1051.98,-2671.02 1055,-2668 ; 1090,-2551 1090,-2547 ; 1093,-2565 1114,-2565 ; 1096,-2950 1096,-2804 1114,-2786 1114,-2487 1136,-2465 1200,-2465 ; 1126.46,-2196 1126.46,-2028.54 1192,-1963 1549.54,-1963 1574.54,-1988 1618,-1988 ; v2@1130,-2269 1130,-2203 ; 1178,-2919 1136,-2877 1136,-2529 1163.13,-2501.87 1192.85,-2501.87 ; v2(1187,-2227) 1187,-2176 ; 1192.85,-2627 1192.85,-2731.85 v2(1212,-2751) ; 1192.85,-2564.86 v2@1294.86,-2564.86 ; 1193,-2537 1179,-2537 1156,-2560 1156,-2862 1188,-2894 1286,-2894 ; 1195,-2594 1182,-2594 1174,-2602 1174,-2846 1198,-2870 1327,-2870 1384,-2927 ; 1207,-2085.54 v2@1415,-2085.54 ; 1222.85,-2501.87 1226.72,-2498 ; 1222.85,-2470.37 1229.36,-2463.86 ; 1223,-2441 1231.8,-2432.2 ; 1227,-2440 1234.8,-2432.2 ; v2(1229,-2679) 1251,-2701 1251,-2793 ; 1230,-2410 1230,-2154 ; 1243,-2437 1278,-2437 v2(1297,-2419) ; 1248,-2532 1277,-2532 v2(1293,-2516) ; 1250,-2461 1313,-2461 v2@1358,-2416 ; 1251,-2500 1257,-2500 1278,-2479 1350,-2479 1420,-2409 1486,-2409 1495,-2400 1495,-2372 ; 1274,-2347 1274,-2150 ; 1277,-2679 1277,-2647 1362,-2562 1427,-2562 v2@1445,-2580 ; 1285,-2894 1295,-2904 1295,-2942 ; 1302,-2323 1302,-2251 1342,-2211 1342,-2167 ; 1309,-2680 1309,-2643 1355,-2597 v2(1389,-2597) ; 1340,-2682 1340,-2642 1350,-2632 1392,-2632 1401.98,-2641.98 1401.98,-2681 ; 1340,-2355 v5(1340,-2266) ; 1349,-2147 v2@1432,-2147 ; 1372,-2360 1377,-2355 1377,-2208 1398,-2187 1462,-2187 1482.54,-2166.46 1482.54,-2126 ; v2@1395,-2503 1489.26,-2503 1519.62,-2533.36 ; 1402,-2358 1402,-2220 1415.5,-2206.5 1495.5,-2206.5 1560,-2142 ; v2(1429,-2453) 1477,-2453 1522.62,-2407.38 1549.62,-2407.38 ; 1432,-2364 1436,-2360 ; 1436,-2354.23 v5@1436,-2248 ; 1464,-2712 1464,-2705 ; 1465.98,-2351.29 1465.98,-2313.02 1484,-2295 1484,-2211 ; 1467,-2713 1491,-2737 1504,-2737 1517,-2750 1517,-2795 1557,-2835 1614,-2835 1618,-2831 ; v2@1475,-2540 1482,-2540 1497,-2555 1497,-2592 1503,-2598 1546,-2598 ; 1482.54,-2122.46 1482.54,-2077.46 1494,-2066 v2@1494,-2021 ; 1484.54,-2297.46 1661,-2297.46 1687,-2323.46 1734,-2323.46 1734,-2341.12 ; 1497,-2963 1512,-2963 v2(1565,-2910) ; 1497,-2712 1617,-2712 ; 1519.62,-2564.86 1570,-2564.86 ; 1519.62,-2501.87 1622.63,-2501.87 1660,-2539.24 1660,-2893 1697,-2930 2408,-2930 2428,-2910 2428,-2891 2436,-2883 2436,-2859 ; 1519.62,-2470.37 1627.37,-2470.37 1681,-2524 1681,-2871 1711,-2901 2119,-2901 2161,-2859 ; 1519.62,-2438.87 1632.87,-2438.87 1701,-2507 1701,-2673 1715,-2687 v2(1715,-2840) 1782,-2840 1804,-2862 1878.54,-2862 ; v2(1556,-2678) 1556,-2629 ; v2(1560,-2775) v2@1560.96,-2774.81 ; v2@1561,-2775 1618,-2775 ; 1572,-2565 v2@1620,-2565 ; 1686.46,-2027 1707.46,-2006 1802,-2006 1846,-2050 1846,-2444 1873,-2471 2094,-2471 2096,-2473 ; v2@1704,-2835 v2@1704,-2831 ; 1760,-2635 1765,-2630 ; 1897,-2576 1948.54,-2576 1948.54,-2633.54 1978,-2663 ; 1982,-2297.16 1982,-2281 ; 2015.46,-2577 2063,-2577 ; 2071.96,-2673 2071.96,-2566.84 ; 2173,-2577 2221,-2577 ; 2225,-2596 2228,-2599 2228,-2630 2267,-2669 ; 2230.46,-2858 2230.46,-2768.54 ; 2232,-2769 2245,-2769 ; 2234,-2855 2334,-2855 ; 2282,-2297.16 2282,-2167 2315,-2134 ; 2315.46,-2577 2365,-2577 ; 2453,-2572 2495,-2572 ; 2509,-2874 2509,-2779 ; 2509,-2867 2607,-2867 ; 2509,-2866 2534.01,-2866 ; 2528,-2594 2548.54,-2614.54 2548.54,-2675.46 ; 2582,-2335 2582,-2297.16
  Top Layer w10: 1314,-2800 1314,-2805 1394,-2885 1462,-2885 v2@1493,-2854 ; v2(1624,-2347) 1721,-2444 1721,-2569 1751,-2599 ; 1942,-2852 1942,-2767 ; 1949.4,-2856 2029,-2856 2044,-2841 ; 2350.96,-2656.96 2350.96,-2564 ; 2452,-2636 v2(2492,-2636) ; 2583,-2570 2630,-2570
  Top Layer w12: 1338,-2706 1340,-2708 1340,-2747 1377,-2784 1384,-2784 ; 1368,-2701 1371,-2704 1371,-2729 1378,-2736 ; 1379,-2737 1451,-2737 1451,-2763 ; 1382,-2812 1382,-2791 ; v2@1413,-2847 1413,-2807 ; 1434,-2732 1434,-2697 ; 1451,-2790 1454,-2790 ; 1476,-2805.72 1476,-2829 v2(1497,-2850) ; 1751,-2602 1751,-2599 ; 1755,-2603 1758,-2603 ; 1817,-2312 1817,-2453 1839,-2475 1839,-2728 ; v6(1848,-2788) 1899,-2788 ; 2125,-2660 v2(2125,-2622)
  Top Layer w16: 1733,-2323.46 1743,-2333.46 1743,-2395 1770,-2422 1770,-2515.88
  Top Layer w20: v1@1760,-2787 1760,-2635
  Top Layer w25: 2912,-2659 2912,-2171
  Top Layer w39: 2071.96,-2566.84 2071.96,-2499.04 ; 2350.96,-2569.84 2350.96,-2497 ; 2630.96,-2571.84 2630.96,-2511.96
  Top Layer w45: 2715.96,-2707 2715.96,-2490.04
  Top Layer w50: 2079,-2492 2814,-2492
  Top Layer w80: 2744,-2950 2837,-2950 ; 2812,-2473 v1@2812,-1983.54 ; 2900.46,-2865 2900.46,-2682
  Bottom Layer w8: v1(1051.98,-2758.01) 1051.98,-2611 v4(1156.98,-2506) v4@1156.98,-2508.94 ; 1081,-2082.54 1281,-2082.54 ; 1131,-2153.4 1131,-2210 1148,-2227 v2(1187,-2227) ; v2@1132,-2274 v5@1342,-2274 ; 1148,-2149.46 1148,-2129 ; 1154.46,-2333 1232.54,-2333 ; 1156,-2158 1151,-2153 1151,-2149.46 1023.46,-2149.46 999,-2125 999,-1997 1034,-1962 1034,-1961 2350,-1961 ; 1196,-2966 1196,-2874 1168,-2846 1168,-2730 1183,-2715 1280,-2715 1295,-2700 v2(1295,-2574) ; v2@1211,-2737 1269,-2737 1294,-2762 1294,-2967 ; 1215,-2149.46 1335.54,-2149.46 1336,-2149 1337,-2149 1352,-2134 1352,-2057 1422,-1987 1971,-1987 2005,-2021 2054,-2021 2060,-2027 ; 1221,-2474.46 1287.46,-2474.46 1294,-2481 1294,-2515 v2(1293,-2516) ; 1228,-2079 1228,-2014 ; v2(1229,-2679) 1229,-2481 ; v2@1274,-2231 1274,-2149.46 ; v2@1300,-2416 1300,-2335 ; 1345,-2539 1344,-2540 1344,-2881 1405,-2942 1405,-2957 1396,-2966 ; v2(1357.21,-2416.79) 1395,-2453 v2(1429,-2453) ; v2@1391,-2596 1422,-2627 1798,-2627 1891,-2720 2188,-2720 2215,-2693 2237,-2693 ; v2(1431,-2146) 1548,-2146 ; v2(1431,-2083) 1374,-2140 1374,-2246 1475,-2347 v2@1475,-2540 ; v5@1435,-2245 1487,-2297 1710,-2297 ; v2@1452,-2593 1455,-2596 1818,-2596 1888,-2666 1934,-2666 1949,-2681 ; 1465,-2731 1465,-2629 ; v2@1494,-2009 v2@1497,-2012 ; 1496,-2966 1496,-2954 ; 1553.08,-2502.79 1554,-2594 ; v2(1556,-2678) 1818,-2678 1882,-2742 2491,-2742 ; 1556,-2135.46 1724,-2135.46 ; v2(1565,-2910) 1589,-2910 ; v2@1574,-2912 1646.54,-2912 1647.54,-2913 ; v2(1622,-2562) 1672,-2562 1675.61,-2558.39 1675.61,-2513.99 ; 1669,-2731 1669,-2680 ; 1684,-2282 1687,-2285 1737,-2285 ; v2@1712,-2830 1713,-2830 1713,-2917 ; 1724,-2059.6 1831.6,-2059.6 1859.54,-2087.54 1888,-2087.54 ; 1726.5,-2293.5 1800.46,-2219.54 1803,-2219.54 ; 1750,-2502 1750,-2430 ; 1803,-2292 1803,-2286.46 ; 1804,-2287 1809,-2292 ; 1902,-2576 1948.54,-2576 ; 1905,-2507 1905,-2498 ; v1@1909,-2117 1972,-2117 v1@1982,-2127 ; v1@1909,-2103.54 2043.54,-2103.54 v1@2057,-2117 ; 1971.5,-2489.04 2742,-2489.04 ; v1@1979,-2117 v1@1982,-2120 ; 2015.46,-2684 2015.46,-2576 2071.96,-2576 ; 2071.96,-2581.5 2071.96,-2566.84 ; 2172,-2519.08 2209.08,-2482 2710,-2482 ; 2184,-2577 2225,-2577 ; 2216,-2271.54 2282,-2271.54 ; 2282,-2297.16 2282,-2271.54 ; 2282,-2167 2282,-2271.54 ; 2296.32,-2965.46 2312,-2965.46 ; 2300.4,-2575 2350,-2575 ; 2315.46,-2687 2315.46,-2577 ; 2453,-2571 2499.54,-2571 ; v2@2492,-2631 2492,-2587 ; 2526,-1982 2541,-1967 ; 2580.4,-2570 2630.8,-2570 ; 2581,-2575 2581,-2629 2593,-2641 2593,-2696 ; 2581,-2335 2581,-2297.16 2581,-2182.54
  Bottom Layer w10: v2(1496,-2024) 1511,-2009 1530.91,-2009 ; 1811,-2295 1846,-2330 1846,-2432 1891,-2477 1891,-2478 ; 2712.6,-2707.4 2712.6,-2627
  Bottom Layer w12: v4(1061,-2014) v2@1285,-2014 ; 1487,-2947 1496,-2938 v2@1496,-2858 ; v2@1624,-2348 1691,-2415 ; 2092,-2998 2092,-2955.46 ; v2@2125,-2624 2169,-2580 ; 2344.46,-2849 2380,-2849 ; 2379,-2809 2379,-2808.54 ; 2504,-2777 2512,-2785
  Bottom Layer w15: 2389,-2873 2458,-2873 ; 2402.54,-2785 2636.25,-2785 2694.77,-2724.59
  Bottom Layer w20: 1514,-2997 2229,-2997 ; 1768,-2992 v1@1768,-2787 ; 2234,-2967 2311,-2967 ; 2313,-2970 2482,-2970
  Bottom Layer w39: 1892,-2568 1892,-2481 ; 2451,-2555.28 2451,-2498.01
  Bottom Layer w40: 2172,-2546 2172,-2519.08
  Bottom Layer w65: 1900,-2489.04 2717,-2489.04
  Bottom Layer w80: 2710,-2482 2710,-2215 2902,-2215 2902,-2331 2817,-2331 2814,-2334 2814,-2496 2902,-2496 2902,-2864
  other v1: 2857,-2967 2891,-2899 1761,-2787 1982,-2108 2053,-2108 1919,-2107 2263,-2105 2195,-2104 2334,-2104 2481,-2091 2547,-2091 2615,-2091 2227,-2038 2615,-2019 2478,-2018 2548,-2016 2800,-1995 2885,-1995
  other v2: 1417,-2845 1454,-2592 1475,-2539 1391,-2515 1129,-2269 1035,-2262 1605,-2231 1272,-2230 1287,-2010
  other v5: 1438,-2246

## Polygon pours and split planes (outlines as drawn)
GND on Top Layer "Top Layer-GND" (hatched 90Degree grid 6 track 10, pour order 1000): 835.79,328 1613,328 1613,254 808,254 808,328
no net on Top Layer "Top Layer-GND" (hatched 90Degree grid 6 track 10, remove dead copper, pour order 1000): 1845.97,-2721 2824,-2721 2824,-3004 1811,-3004 1811,-2721
no net on Top Layer "Top Layer-GND 1" (hatched 90Degree grid 6 track 10, remove dead copper, pour order 1000): 999,-1951 1874,-1951 1874,-2321 992,-2321 992,-1951
GND on Top Layer "Top Layer-GND 1" (hatched 90Degree grid 6 track 10, remove dead copper, pour order 1000): 160.86,1076 893,1076 893,335 155,335 155,1076
no net on Bottom Layer "Bottom Layer-GND 2" (hatched 90Degree grid 4 track 10, remove dead copper, pour order 1003): 2601.5,-2893.92 2601.5,-3003 2815,-3003 2815,-2884 2602.45,-2884
no net on Bottom Layer "Bottom Layer-GND 1" (hatched 90Degree grid 4 track 10, remove dead copper, pour order 1002): 2483,-2659 2826,-2659 2826,-2958 2491.88,-2958 2491.88,-2666.26
no net on Bottom Layer "Bottom Layer-GND" (hatched 90Degree grid 4 track 10, remove dead copper, pour order 1001): 1421.87,-2704 2412,-2704 2412,-2909 1385,-2909 1385,-2704.95 1401.39,-2704.95
no net on Bottom Layer "Bottom Layer-GND 6" (hatched 90Degree grid 6 track 10, remove dead copper, pour order 1004): 1469.81,-1992 1853,-1992 1853,-2276 1468,-2276 1468,-1992
no net on Bottom Layer "Bottom Layer-GND 3" (hatched 90Degree grid 4 track 10, remove dead copper, pour order 1002): 988.33,-2182 1189,-2182 1189,-2810.44 991.4,-2810.44 991.4,-2183.82
no net on Bottom Layer "Bottom Layer-GND 5" (hatched 90Degree grid 4 track 10, remove dead copper, pour order 1003): 990.33,-2742.01 990.33,-3010 1112,-3010 1112,-2739 991.12,-2739
GND on Bottom Layer "Bottom Layer-GND 3" (hatched 90Degree grid 4 track 10, remove dead copper, pour order 1002): 15.33,872 216,872 216,227 18.4,227 18.4,870.13
GND on Bottom Layer "Bottom Layer-No Net" (hatched 90Degree grid 4 track 10, remove dead copper, pour order 1000): 23,233 25.07,231 146,231 146,60 128.43,43 23,43 23,229
GND on Bottom Layer "Bottom Layer-GND 6" (hatched 90Degree grid 6 track 10, remove dead copper, pour order 1004): 743.61,884 448.27,884 448.27,1062.21 745,1062.21 745,884
GND on Bottom Layer "Bottom Layer-GND" (hatched 90Degree grid 4 track 10, remove dead copper, pour order 1001): 447.11,350 1390,350 1390,153 412,153 412,349.08 427.61,349.08

## Keep-outs
Keep-Out Layer:
  lines w10: 985,-3056 2954,-3056 ; 985,-3054 985,-1926 2953.5,-1926 2953.5,-3056 ; 987,-3065 2556,-3065 ; 1968.5,1151.54 0,1151.54 0,-2 1968.5,-2 1968.5,1152 ; 2551,-3058 2553,-3056

## Other copper
Top Layer:
  rectangle: 2748,-2055 2943,-1942
  rectangle: 1874,-2187 2091,-1957
  rectangle: 2153,-2193 2371,-1958
  rectangle: 2433,-2266 2649,-1951
  rectangle: 2804,-3009 2942,-2864
  rectangle net GND: 1838,47 1953,189
  rectangle net PHASE_C: 1460,788 1676,1103
  rectangle net PHASE_B: 1180,861 1398,1096
  rectangle net PHASE_A: 901,867 1118,1097
  rectangle net VCC: 1742,996 1937,1109
Bottom Layer:
  rectangle: 2153,-2047 2290,-1989
  rectangle: 2816,-3008 2942,-2864
  rectangle: 1871,-3000 2007,-2939
  rectangle: 1340,-2548 1440,-2486
  rectangle: 2747,-2054 2943,-1941
  rectangle: 2433,-2196 2650,-1951
  rectangle: 2152,-2184 2369,-2046
  rectangle: 1874,-2202 2091,-2077
  rectangle net PHASE_A: 901,852 1118,977
  rectangle net PHASE_B: 1179,870 1396,1008
  rectangle net PHASE_C: 1460,858 1677,1103
  rectangle net VCC: 1741,996 1937,1109
  rectangle net PPM: 367,486 467,548
  rectangle net +5V: 898,54 1034,115
  rectangle net GND: 1840,46 1954,189
  rectangle net PHASE_B: 1180,1007 1317,1065

## Silkscreen, mask and mechanical layers (free items; w line width, h text height)
Top Overlay:
  text "V+" at 1730,1020 h40 r90
  text "GND" at 111,654 h30
  text "3" at 679,326 h30
  text "." at 299,312 h40
  text "2" at 679,265 h30
  text "SDA" at 31,218 h30
  text "1" at 686,204 h30
  text "SCL" at 31,169 h30
  text "C_H" at 1682,167 h30
  text "A_H" at 1030,139 h30
  text "B_H" at 1329,121 h30
  text "V-" at 1806,74 h40 r90
  text "9" at 52,54 h30
  text "1" at 589,48 h30
  text "V+" at 2739,-2021 h40 r90
  text "GND" at 1084,-2400 h30
  text "3" at 1652,-2728 h30
  text "." at 1272,-2742 h40
  text "2" at 1652,-2789 h30
  text "SDA" at 1004,-2836 h30
  text "1" at 1659,-2850 h30
  text "TPA" at 2660,-2880 h30
  text "SCL" at 1004,-2885 h30
  text "TPC" at 2003,-2923 h30
  text "TPB" at 2300,-2940 h30
  text "V-" at 2821,-2985 h40 r90
  text "Mikrokopter BL-Ctrl V1.29" at 1899,-2990 h30
  text "9" at 1020,-3008 h30
  text "1" at 1548,-3009 h30
Bottom Overlay:
  text "+V" at 1731,1040 h40 r90
  text "PPM" at 414,578 h27
  text "A_L" at 611,474 h30
  text "C_L" at 731,378 h30
  text "B_L" at 441,306 h30
  text "GND" at 1014,249 h30
  text "+5v" at 885,72 h30
  text "10" at 80,48 h30
  text "2" at 589,42 h30
  text "-V" at 1816,25 h40 r90
  text "+V" at 2740,-2032 h40 r90
  text "PPM" at 1387,-2476 h27
  text "TPA" at 1584,-2580 h30
  text "TPC" at 1704,-2676 h30
  text "TPB" at 1414,-2748 h30
  text "GND" at 1987,-2805 h30
  text "+5v" at 1858,-2982 h30
  text "-V" at 2833,-2982 h40 r90
  text "10" at 1053,-3006 h30
  text "2" at 1562,-3012 h30
Top Solder:
  rectangle: 2804,-3010 2942,-2864
  rectangle: 2748,-2056 2942,-1942
  rectangle: 2433,-2158 2650,-1950
  rectangle: 2154,-2157 2369,-1959
  rectangle: 1874,-2160 2091,-1957
  rectangle: 901,894 1118,1097
  rectangle: 1181,897 1396,1095
  rectangle: 1460,896 1677,1104
  rectangle: 1743,995 1937,1109
  rectangle: 1838,47 1953,191
Bottom Solder:
  rectangle: 2164,-2056 2293,-1988
  rectangle: 1871,-2899 2014,-2821
  rectangle: 1871,-3007 2006,-2940
  rectangle: 1340,-2548 1440,-2486
  rectangle: 2804,-3010 2942,-2866
  rectangle: 1875,-2158 2093,-2076
  rectangle: 2151,-2158 2374,-2045
  rectangle: 2748,-2055 2945,-1942
  rectangle: 2433,-2157 2651,-1953
  rectangle: 1460,897 1678,1101
  rectangle: 1741,996 1938,1109
  rectangle: 1178,896 1401,1009
  rectangle: 902,896 1120,978
  rectangle: 1840,45 1954,189
  rectangle: 367,486 467,548
  rectangle: 898,47 1033,114
  rectangle: 898,155 1041,233
  rectangle: 1191,998 1320,1066
  lines w10: 1841,568 1850,559 ; 1914,838 1932,841 ; 1932,712 1939,719 1941,722 ; 2711,-2488 2712,-2487 ; 2814,-2486 2823,-2495 ; 2905,-2342 2912,-2335 2914,-2332 ; 2905,-2213 2909,-2215
  lines w80: 1780,839 1910,839 1910,723 1841,723 1841,559 ; 1843,559 1845,557 1910,557 1910,170 ; 2707,-2215 2902.5,-2215 ; 2814,-2495 2814,-2330 2902,-2330 2902,-2218 ; 2816,-2495 2818,-2497 2902,-2497 2902,-2865
Drill Drawing:
  text ".Legend" at 2135,73 h60

## Dimensions
0,-2 to 0,1151.54 on Mechanical 1
0,-2 to 1968.5,-2 on Mechanical 1